# Altium PCB guitar_tuner.PcbDoc
Units mil, origin at the board's own origin, x right, y up, seen from the top; angles counter-clockwise.
Board outline 3140 x 3665 mil, 2 copper layers (Top Layer, Bottom Layer); 53 components, 59 nets, 206 pads, 16 vias.
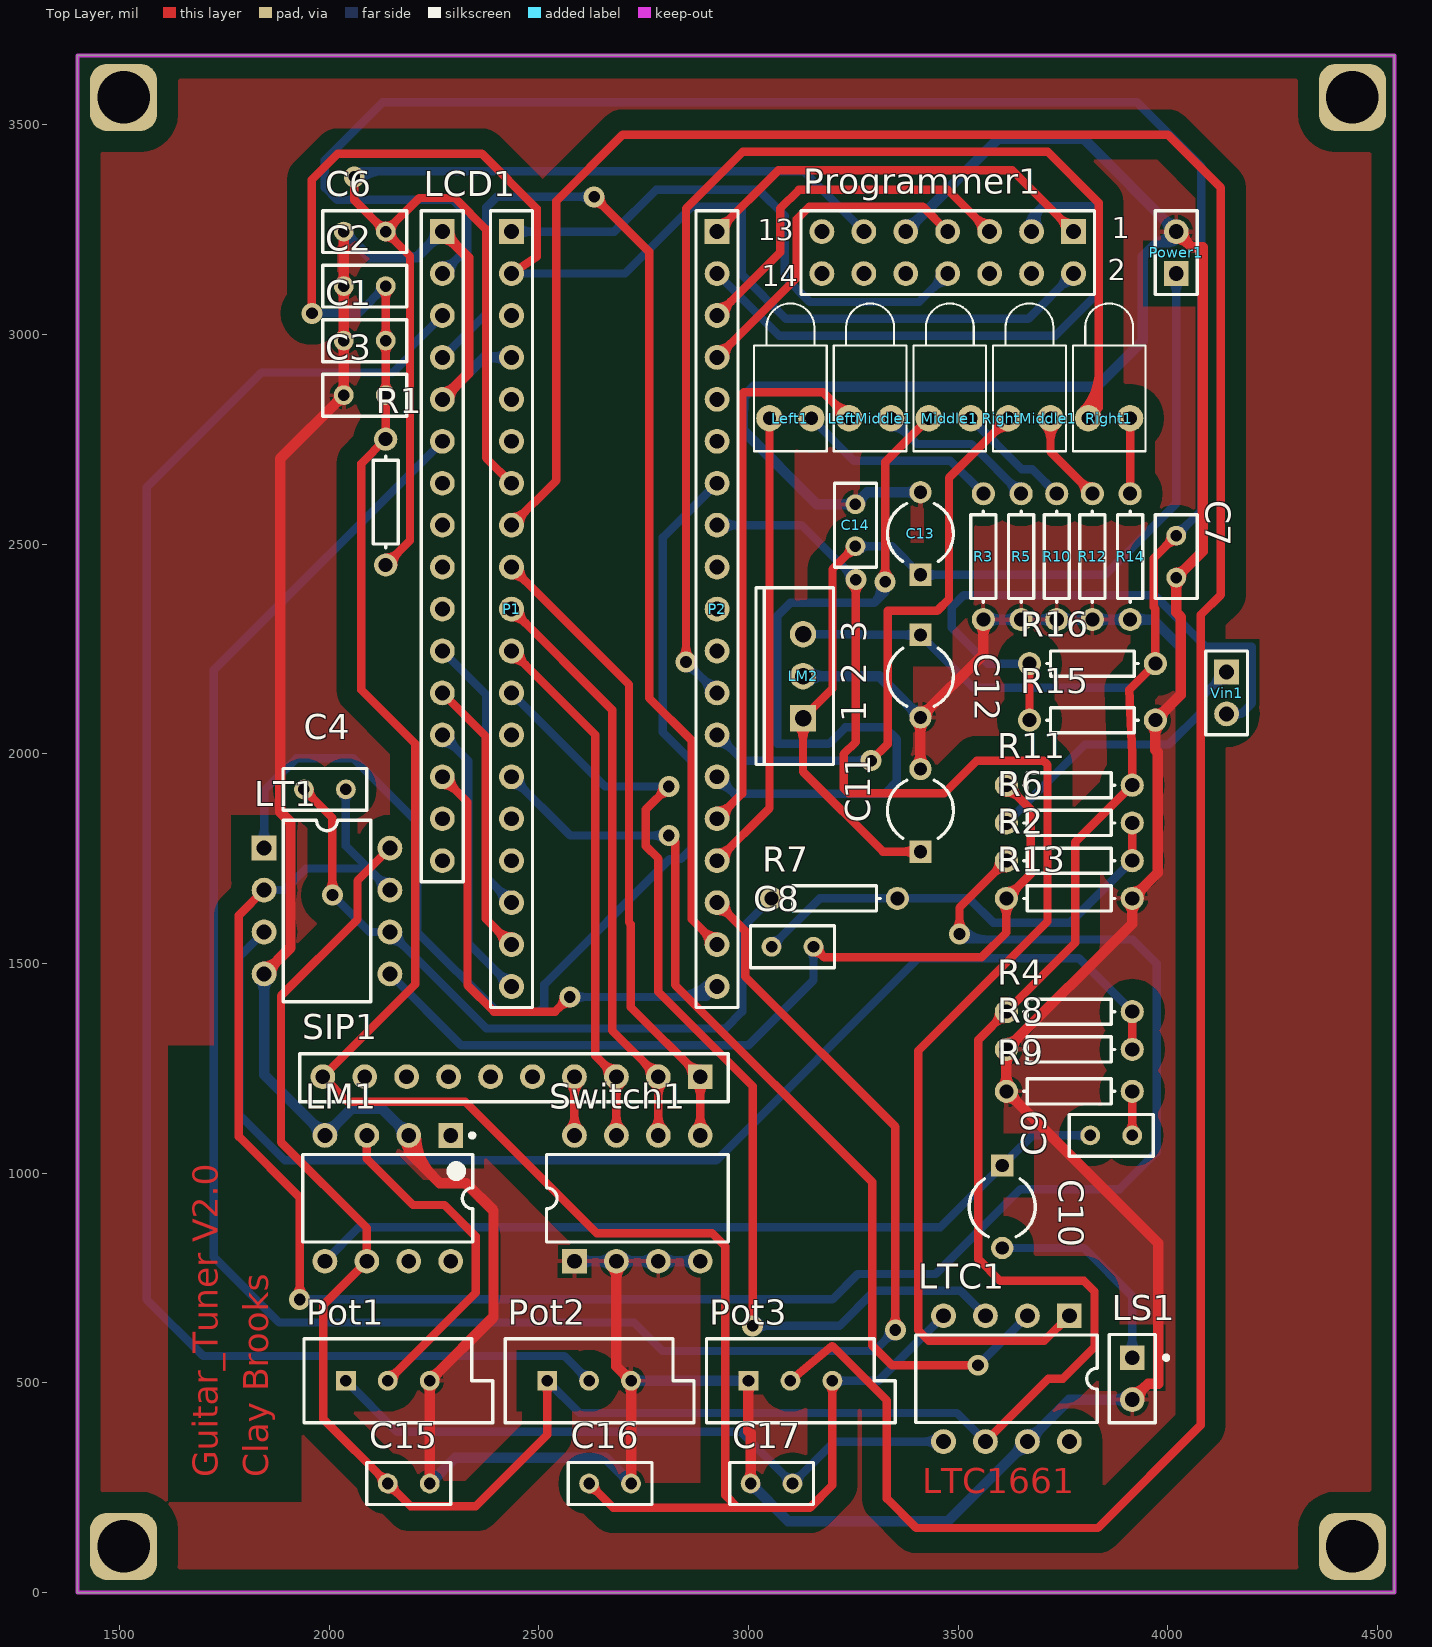
[diagram p0: Top Layer view]
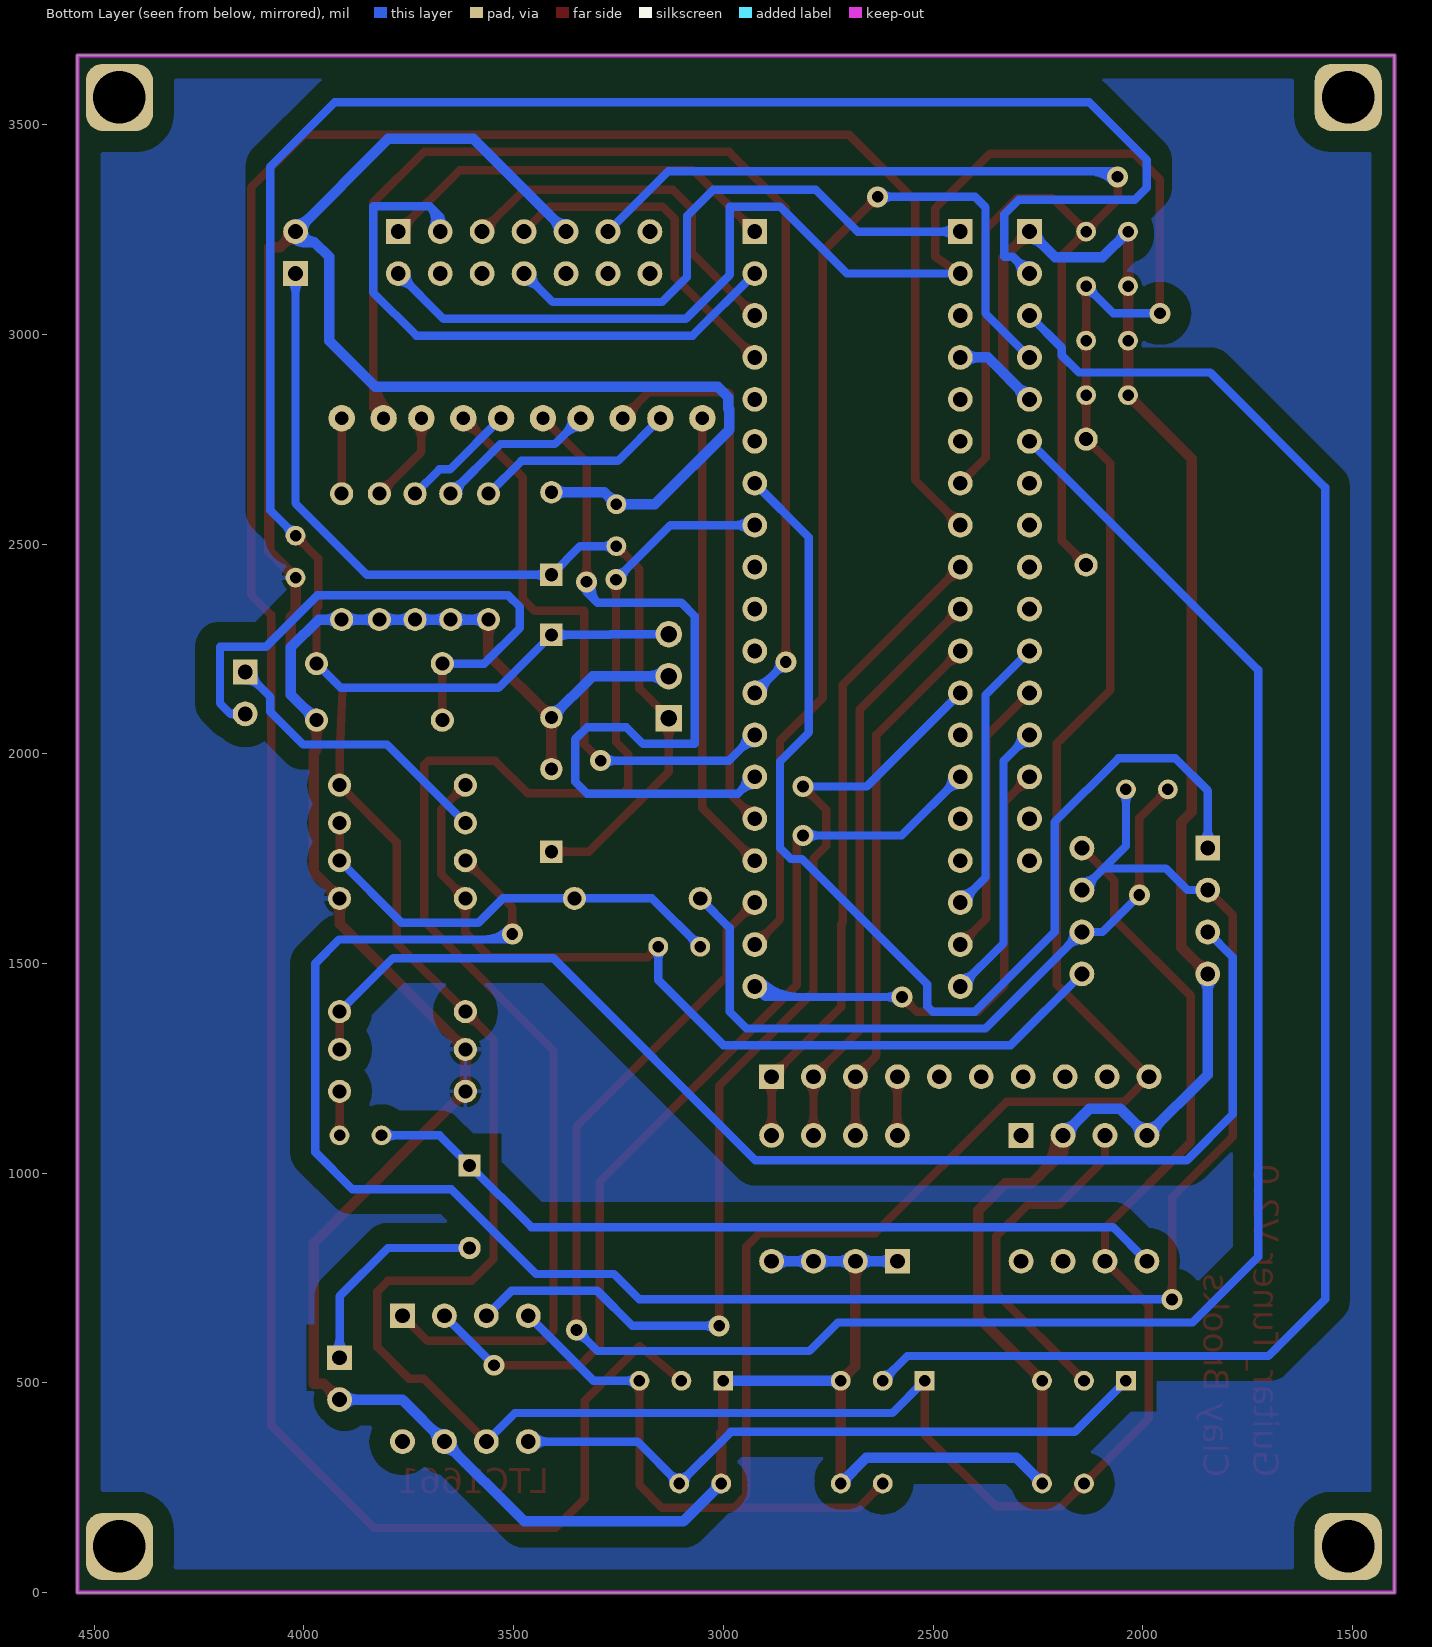
[diagram p1: Bottom Layer view, seen from below]

## Layer stack, top to bottom
Top Layer: signal copper 1.4
Dielectric: dielectric 12.6, FR-4, Dk 4.8
Bottom Layer: signal copper 1.4

## Board outline
1400,0 1400,3665 4540,3665 4540,0 1400,0

## Design rules (kind name [scope] priority, off if disabled: settings)
Clearance "PolyGon Pour Clearance" [InPolyGon] p1: gap=50
PolygonConnect [All] p1: connectstyle=Relief reliefconductorwidth=10 reliefentries=4 polygonreliefangle="90 Angle" airgapwidth=10
RoutingVias [All] p1: holewidth=28 width=50 viastyle="Through Hole" minholewidth=28 minwidth=50 maxholewidth=28 maxwidth=50
SilkscreenOverComponentPads [All] p1: minsilkscreentomaskgap=10
SolderMaskExpansion [All] p1: expansion=4
Width "Schematic Width Constraint" [InNet('GND')] p1: maxlimit=30 minlimit=20 preferedwidth=25
Width "GND net width" [InNet('GND')] p2: maxlimit=30 minlimit=20 preferedwidth=30
Width [All] p3: maxlimit=20 minlimit=20 preferedwidth=20
27 further rules are at their usual default settings.

## Components (designator, comment, footprint, x,y, rotation, side; value= is the part's Value field where it differs from the comment)
C1 "Cap" RAD-0.1 2085,2985 r0 top
C2 "Cap" RAD-0.1 2085,3115 r180 top
C3 "Cap" RAD-0.1 2085,2855 r180 top
C4 "Cap" RAD-0.1 1990,1915 r0 top
C6 "Cap" RAD-0.1 2085,3245 r180 top
C7 "Cap" RAD-0.1 4020,2470 r270 top
C8 "Cap" RAD-0.1 3105,1540 r180 top
C9 "Cap" RAD-0.1 3865,1090 r180 top
C10 "Cap Pol1" CAPR5-4X5 3605,920 r270 top
C11 "Cap Pol1" CAPR5-4X5 3410,1865 r90 top
C12 "Cap Pol1" CAPR5-4X5 3410,2185 r270 top
C13 "Cap Pol1" CAPR5-4X5 3410,2525 r90 top
C14 "Cap" RAD-0.1 3255,2545 r270 top
C15 "Cap" RAD-0.1 2190,260 r0 top
C16 "Cap" RAD-0.1 2670,260 r0 top
C17 "Cap" RAD-0.1 3055,260 r180 top
LCD1 "Header 16" HDR1X16 2270,3245 r270 top
Left1 "LED1" LED-1 3100,2800 r90 top
LeftMiddle1 "LED1" LED-1 3290,2800 r90 top
LM1 "LM386N-1" N08E 2140,940 r270 top
LM2 "LM330KC" KC03 3130,2185 r90 top
LS1 "Speaker" PIN2 3915,560 r270 top
LT1 "LF353P" P008 1995,1625 r270 top
LTC1 "LTC1661" LTC1661#1 3620,510 r180 top
Middle1 "LED1" LED-1 3480,2800 r90 top
P1 "Header 19" HDR1X19 2435,3245 r270 top locked
P2 "Header 19" HDR1X19 2925,3245 r270 top locked
Pot1 "RPot" VR5 2140,505 r0 top
Pot2 "RPot" VR5 2620,505 r0 top
Pot3 "RPot" VR5 3100,505 r0 top
Power1 "Power" HDR1X2 4020,3145 r90 top
Programmer1 "Header 7X2" HDR2X7 3775,3245 r180 top
R1 "Res1" AXIAL-0.3 2135,2600 r90 top
R2 "Res1" AXIAL-0.3 3765,1745 r180 top
R3 "Res1" AXIAL-0.3 3560,2470 r270 top
R4 "Res1" AXIAL-0.3 3765,1385 r0 top
R5 "Res1" AXIAL-0.3 3650,2470 r270 top
R6 "Res1" AXIAL-0.3 3765,1835 r0 top
R7 "Res1" AXIAL-0.3 3205,1655 r180 top
R8 "Res1" AXIAL-0.3 3765,1295 r0 top
R9 "Res1" AXIAL-0.3 3765,1195 r180 top
R10 "Res1" AXIAL-0.3 3735,2470 r270 top
R11 "Res1" AXIAL-0.3 3765,1925 r180 top
R12 "Res1" AXIAL-0.3 3820,2470 r270 top
R13 "Res1" AXIAL-0.3 3765,1655 r180 top
R14 "Res1" AXIAL-0.3 3910,2470 r270 top
R15 "Res1" AXIAL-0.3 3820,2080 r180 top
R16 "Res1" AXIAL-0.3 3820,2215 r180 top
Right1 "LED1" LED-1 3860,2800 r90 top
RightMiddle1 "LED1" LED-1 3670,2800 r90 top
SIP1 "Component_1" RPack 2720,1210 r180 top
Switch1 "Component_1" LTC1661#2 2735,955 r0 top
Vin1 "GuitarIn" HDR1X2 4140,2195 r270 top

## Footprints (in the part's own frame and the unit in brackets; to place one, negate y for a bottom-side part, rotate by r counter-clockwise, add the part's x,y. Pads: shape width x height; smd on the part's side, far side on the other; paste and mask are expansions set on the pad)
AXIAL-0.3 [mm] "Axial Device, Thru-Hole; 2 Leads; 0.3 in Pin Spacing"
  round 1.4 hole 0.85: 1(-3.81,0) 2(3.81,0)
  silkscreen extent -2.77,-0.76 2.77,0.76
CAPR5-4X5 [mm] "Capacitor; 2 Leads"
  rect 1.35x1.35 hole 0.8: 1(-2.5,0)
  round 1.35 hole 0.8: 2(2.5,0)
  silkscreen extent -1.69,-2 1.82,2
HDR1X2 [mm] "Connector; Header; 2 Position"
  rect 1.5x1.5 hole 0.9: 1(0,0)
  round 1.5 hole 0.9: 2(2.54,0)
  silkscreen extent -1.27,-1.27 3.81,1.27
HDR1X16 [mm] "Connector; Header; 16 Position"
  rect 1.5x1.5 hole 0.9: 1(0,0)
  round 1.5 hole 0.9: 2(2.54,0) 3(5.08,0) 4(7.62,0) 5(10.16,0) 6(12.7,0) 7(15.24,0) 8(17.78,0) 9(20.32,0) 10(22.86,0) 11(25.4,0) 12(27.94,0) 13(30.48,0) 14(33.02,0) 15(35.56,0) 16(38.1,0)
  silkscreen extent -1.27,-1.27 39.37,1.27
HDR1X19 [mm] "Connector; Header; 19 Position"
  rect 1.5x1.5 hole 0.9: 1(0,0)
  round 1.5 hole 0.9: 2(2.54,0) 3(5.08,0) 4(7.62,0) 5(10.16,0) 6(12.7,0) 7(15.24,0) 8(17.78,0) 9(20.32,0) 10(22.86,0) 11(25.4,0) 12(27.94,0) 13(30.48,0) 14(33.02,0) 15(35.56,0) 16(38.1,0) 17(40.64,0) 18(43.18,0) 19(45.72,0)
  silkscreen extent -1.27,-1.27 46.99,1.27
HDR2X7 [mm] "Connector; Header; 7x2 Position"
  rect 1.5x1.5 hole 0.9: 1(0,0)
  round 1.5 hole 0.9: 2(0,2.54) 3(2.54,0) 4(2.54,2.54) 5(5.08,0) 6(5.08,2.54) 7(7.62,0) 8(7.62,2.54) 9(10.16,0) 10(10.16,2.54) 11(12.7,0) 12(12.7,2.54) 13(15.24,0) 14(15.24,2.54)
  silkscreen extent -1.27,-1.27 16.51,3.81
KC03 [mm] "TO, Thru-Hole, Vertical, Heatsink Mounted; 3 In-Line Leads; Pitch 2.54 mm"
  rect 1.6x1.6 hole 1: 1(-2.54,0)
  round 1.6 hole 1: 2(0,0) 3(2.54,0)
  silkscreen extent -5.35,-1.85 5.35,2.85
LED-1 [mm] "LED; 2 Leads"
  round 1.6 hole 0.8: 1(0,1.27) 2(0,-1.27)
  silkscreen extent -2,-2.2 6.95,2.2
LTC1661#1 [mm]
  rect 1.5x1.5 hole 0.9: 1(-3.683,-3.81)
  round 1.5 hole 0.9: 2(-1.143,-3.81) 3(1.397,-3.81) 4(3.937,-3.81) 5(3.937,3.81) 6(1.397,3.81) 7(-1.143,3.81) 8(-3.683,3.81)
  silkscreen extent -5.37,-2.65 5.63,2.65
LTC1661#2 [mm]
  rect 1.5x1.5 hole 0.9: 1(-3.81,-4.191)
  round 1.5 hole 0.9: 2(-1.27,-4.191) 3(1.27,-4.191) 4(3.81,-4.191) 5(3.81,3.429) 6(1.27,3.429) 7(-1.27,3.429) 8(-3.81,3.429)
  silkscreen extent -5.5,-3.03 5.5,2.27
N08E [mm] "DIP, 8-Leads, Row Spacing 7.62mm, Pitch 2.54mm, Body 9.91x6.35mm"
  rect 1.5x1.5 hole 0.9: 1(-3.81,3.81)
  round 1.5 hole 0.9: 2(-3.81,1.27) 3(-3.81,-1.27) 4(-3.81,-3.81) 5(3.81,-3.81) 6(3.81,-1.27) 7(3.81,1.27) 8(3.81,3.81)
  silkscreen extent -3.93,-5.15 2.65,5.24, body extent -3.6,-5.15 3.6,5.15, height 5.34
P008 [mm] "DIP; 8 Leads; Row Spacing 7.62 mm; Pitch 2.54 mm"
  rect 1.5x1.5 hole 0.9: 1(-3.81,-3.81)
  round 1.5 hole 0.9: 2(-1.27,-3.81) 3(1.27,-3.81) 4(3.81,-3.81) 5(3.81,3.81) 6(1.27,3.81) 7(-1.27,3.81) 8(-3.81,3.81)
  silkscreen extent -5.5,-2.65 5.5,2.65
PIN2 [mm] "Photosensitive Diode; 2 Leads"
  rect 1.5x1.5 hole 0.9: 1(0,0)
  round 1.5 hole 0.9: 2(2.54,0)
  silkscreen extent -1.4,-1.4 3.94,2.18
RAD-0.1 [mm] "Radial Cap, Thru-Hole; 2 Leads; 0.1 in Pin Spacing"
  round 1.2 hole 0.7: 1(-1.27,0) 2(1.27,0)
  silkscreen extent -2.54,-1.27 2.54,1.27
RPack [mm]
  rect 1.5x1.5 hole 0.9: 1(-4.191,-0.508)
  round 1.5 hole 0.9: 2(-1.651,-0.508) 3(0.889,-0.508) 4(3.429,-0.508) 5(5.969,-0.508) 6(8.509,-0.508) 7(11.049,-0.508) 8(13.589,-0.508) 9(16.129,-0.508) 10(18.669,-0.508)
  silkscreen extent -5.88,-1.91 20.07,1.02
VR5 [mm] "Thru-Hole; 3 Leads"
  rect 1.2x1.2 hole 0.7: 1(-2.54,0)
  round 1.2 hole 0.7: 2(0,0) 3(2.54,0)
  silkscreen extent -5.08,-2.54 6.35,2.54

## Part data
C1 C2 C3 C4 C6 C7 C8 C9 C14 C15 C16 C17: "Capacitor"
C10 C11 C12 C13: "Polarized Capacitor (Radial)"
LCD1: "Header, 16-Pin"
Left1 LeftMiddle1 Middle1 Right1 RightMiddle1: "Typical RED GaAs LED"
LM1: "Low Voltage Audio Power Amplifier, 8-pin MDIP"
LM2: "3-Terminal Positive Regulator"
LS1: "Loudspeaker"
LT1: "Dual Operational Amplifier"
P1 P2: "Header, 19-Pin"
Pot1 Pot2 Pot3: "Potentiometer"
Power1 Vin1: library part "Header 2", "Header, 2-Pin"
Programmer1: "Header, 7-Pin, Dual row"
R1 R2 R3 R4 R5 R6 R7 R8 R9 R10 R11 R12 R13 R14 R15 R16: "Resistor"

## Free pads (board coordinates)
  rrect50% 160x160 hole 125: 5(1510,3565) 6(4440,3565) 7(4440,110) 8(1510,110)

## Via types
v1: diameter 50, hole 28, Top Layer to Bottom Layer, 16 vias

## Nets (pads, with @x,y where several pads share a name; then routed paths per layer and width w, separated by ;. In a path a pad name is that pad's centre, name@x,y a point inside that pad or via, vN(x,y) a via of type N, cw(c..) or ccw(c..) an arc to the next point about the centre after c; other vN are vias at no path point)
2.5V: R15.2 R16.2 Vin1.2 | length 1432.1
  Top Layer w20: R15.2 R16.2
  Bottom Layer w20: R16.2 3570,2215 3485,2300 3485,2350 3513,2378 3968,2378 4091,2255 4200,2255 4200,2120 4175,2095 ; Vin1.2 4175,2095 ; Vin1.2@4156.62,2084.74 cw(c4175,2073.4) 4175,2095 ; Vin1.2@4156.62,2105.26 ccw(c4175,2116.6) 4175,2095
5V: C7.1 C12.1 C15.1 LCD1.2 LM1.6 LM2.3 LT1.8 LTC1.6 Pot2.1 R4.1 R11.1 R16.1 | length 11346.9
  Top Layer w20: C15.1@2126.38,260 ccw(c2093.49,260) 2116.75,283.25 ccw(c2140,306.51) C15.1@2140,273.62 ; C15.1@2140,246.38 cw(c2140,213.49) 2163.25,236.75 cw(c2186.51,260) C15.1@2153.62,260 ; LT1.8 2067.63,1697.63 2067.63,1605.16 1885.47,1423 1885.47,1073.75 2090,869.22 LM1.6 1986,686 1986,414 C15.1 2194,206 2350,206 2520,376 Pot2.1 ; Pot2.1@2510.37,495.37 cw(c2487.11,472.11) 2520,472.11 cw(c2552.89,472.11) Pot2.1@2529.63,495.37 ; LTC1.6 3715,510 3750,510 3825,585 3825,718 3800,743 3600,743 3548,795 3548,1318 R4.1 3778.96,1548.96 3778.96,1788.96 R11.1 3915,1999 3908,2153 R16.1 3970,2346 3966,2350 3966,2466 C7.1 ; R4.1@3597.44,1385 cw(c3555.05,1385) 3585.02,1355.02 cw(c3615,1325.05) R4.1@3615,1367.44 ; C7.1@4006.38,2520 cw(c3973.49,2520) 3996.75,2496.75 cw(c4020,2473.49) C7.1@4020,2506.38
  Bottom Layer w20: LCD1.2 2310,3185 2330,3185 2330,3286.63 2296.02,3320.61 2019.39,3320.61 1990,3350 1990,3415.61 2127.39,3553 3927,3553 4080,3400 4080,2580 C7.1 ; LCD1.2@2270,3164.53 ccw(c2270,3211.67) 2303.34,3178.34 ccw(c2336.67,3145) LCD1.2@2289.53,3145 ; Pot2.1 2597,428 3497,428 LTC1.6 ; LM2.3 3269,2285 3270.57,2283.43 C12.1 3536.43,2157 3912,2157 R16.1 ; C12.1@3398.28,2271.71 ccw(c3369.98,2243.41) 3369.98,2283.43 ccw(c3369.98,2323.44) C12.1@3398.28,2295.15 ; C7.1@4020,2533.62 ccw(c4020,2566.51) 4043.25,2543.25 ccw(c4066.51,2520) C7.1@4033.62,2520
AVCC: P1.16
AVSS: P1.15
GND: C1.1 C2.2 C3.2 C6.2 C7.2 C11.2 C12.2 C13.2 C14.1 C15.2 C16.2 C17.2 LCD1.1 LCD1.5 LM1.2 LM1.4 LM2.2 LS1.2 LT1.4 LTC1.7 P1.4 Pot1.3 Pot2.3 Pot3.1 Power1.2 Programmer1.9 R3.2 R5.2 R8.1 R9.2 R10.2 R12.2 R13.1 R14.2 R15.1 Switch1.1 Switch1.2 Switch1.3 Switch1.4 | length 19096.9
  Top Layer w25: LT1.4 1908,1538 1908,1837 1883,1862 1883,2703 C3.2 C1.1 C2.2 C6.2 ; LT1.4@1845,1492.03 ccw(c1845,1533.14) 1874.07,1504.07 ccw(c1903.14,1475) LT1.4@1862.03,1475 ; C3.2@2023.88,2855 cw(c1997.03,2855) 2016.01,2836.01 cw(c2035,2817.03) C3.2@2035,2843.88 ; C3.2@2027.14,2862.86 ccw(c2008.15,2881.85) 2035,2881.85 ccw(c2061.85,2881.85) C3.2@2042.86,2862.86 ; C1.1@2027.14,2977.14 cw(c2008.15,2958.15) 2035,2958.15 cw(c2061.85,2958.15) C1.1@2042.86,2977.14 ; C1.1@2027.14,2992.86 ccw(c2008.15,3011.85) 2035,3011.85 ccw(c2061.85,3011.85) C1.1@2042.86,2992.86 ; C2.2@2027.14,3107.14 cw(c2008.15,3088.15) 2035,3088.15 cw(c2061.85,3088.15) C2.2@2042.86,3107.14 ; C2.2@2027.14,3122.86 ccw(c2008.15,3141.85) 2035,3141.85 ccw(c2061.85,3141.85) C2.2@2042.86,3122.86 ; LM1.2@2178.2,1077.73 cw(c2151.54,1050) 2190,1050 ; LM1.2@2182.03,1090 ccw(c2259.35,1090) 2204.67,1035.33 ; LM1.2 2190,1050 ; LM1.2@2201.8,1077.73 ccw(c2228.46,1050) 2190,1050 ; LM1.2@2207.03,1090 ccw(c2344.7,1090) 2247.35,992.65 ; Pot1.3@2232.14,497.14 cw(c2213.15,478.15) 2240,478.15 cw(c2266.85,478.15) Pot1.3@2247.86,497.14 ; C15.2 Pot1.3 2392.03,657.03 2392.03,910.92 2327.24,975.7 2264.3,975.7 2190,1050 ; Pot1.3@2240,516.12 ccw(c2240,542.97) 2258.99,523.99 ccw(c2277.97,505) Pot1.3@2251.12,505 ; LCD1.5 2332.03,2907.03 2332.03,3182.97 LCD1.1 ; LCD1.5@2270,2862.03 ccw(c2270,2903.14) 2299.07,2874.07 ccw(c2328.14,2845) LCD1.5@2287.03,2845 ; LCD1.1@2270,3227.97 cw(c2270,3186.86) 2299.07,3215.93 cw(c2328.14,3245) LCD1.1@2287.03,3245 ; Switch1.2@2672.96,777.96 cw(c2643.89,748.89) 2685,748.89 cw(c2726.11,748.89) Switch1.2@2697.04,777.96 ; Switch1.2 2685,540 Pot2.3 C16.2 ; Pot2.3@2708.88,505 ccw(c2682.03,505) 2701.01,523.99 ccw(c2720,542.97) Pot2.3@2720,516.12 ; Pot2.3@2712.14,497.14 cw(c2693.15,478.15) 2720,478.15 cw(c2746.85,478.15) Pot2.3@2727.86,497.14 ; Pot3.1@2992.14,497.14 cw(c2973.15,478.15) 3000,478.15 cw(c3026.85,478.15) Pot3.1@3007.86,497.14 ; C17.2@2997.14,267.86 ccw(c2978.15,286.85) 3005,286.85 ccw(c3031.85,286.85) C17.2@3012.86,267.86 ; Pot3.1 3000,385 3005,380 C17.2 ; C11.2@3400.05,1973.38 ccw(c3376.02,1997.41) 3410,1997.41 ccw(c3443.98,1997.41) C11.2@3419.95,1973.38 ; C12.2@3400.05,2076.62 cw(c3376.02,2052.59) 3410,2052.59 cw(c3443.98,2052.59) C12.2@3419.95,2076.62 ; C11.2 C12.2 3560,2236.57 R3.2 ; C12.2@3410,2100.65 ccw(c3410,2134.63) 3434.03,2110.6 ccw(c3458.05,2086.57) C12.2@3424.07,2086.57 ; R3.2@3549.35,2309.35 cw(c3523.64,2283.64) 3560,2283.64 cw(c3596.36,2283.64) R3.2@3570.65,2309.35 ; R9.2@3604.35,1205.65 ccw(c3578.64,1231.36) 3615,1231.36 ccw(c3651.36,1231.36) R9.2@3625.65,1205.65 ; R8.1@3604.35,1284.35 cw(c3578.64,1258.64) 3615,1258.64 cw(c3651.36,1258.64) R8.1@3625.65,1284.35 ; R9.2@3615,1179.94 cw(c3615,1143.59) 3640.71,1169.29 cw(c3666.41,1195) R9.2@3630.06,1195 ; R8.1@3615,1310.06 ccw(c3615,1346.41) 3640.71,1320.71 ccw(c3666.41,1295) R8.1@3630.06,1295 ; R13.1@3904.35,1644.35 cw(c3878.64,1618.64) 3915,1618.64 cw(c3951.36,1618.64) R13.1@3925.65,1644.35 ; LS1.2 3952.97,497.97 3977.03,497.97 3977.03,832.97 R9.2 R8.1 3915,1595 R13.1 3976,1716 3976,2003 3970,2009 R15.1 4031,2141 4031,2326 4020,2337 C7.2 4083,2483 4083,3208 4057,3208 Power1.2 ; LS1.2@3915,477.03 ccw(c3915,518.14) 3944.07,489.07 ccw(c3973.14,460) LS1.2@3932.03,460 ; R13.1@3915,1670.06 ccw(c3915,1706.41) 3940.71,1680.71 ccw(c3966.41,1655) R13.1@3930.06,1655 ; R15.1@3959.35,2069.35 cw(c3933.64,2043.64) 3970,2043.64 cw(c4006.36,2043.64) R15.1@3980.65,2069.35 ; R15.1@3970,2095.06 ccw(c3970,2131.41) 3995.71,2105.71 ccw(c4021.41,2080) R15.1@3985.06,2080 ; C7.2@4012.14,2412.14 cw(c3993.15,2393.15) 4020,2393.15 cw(c4046.85,2393.15) C7.2@4027.86,2412.14 ; C7.2@4020,2431.12 ccw(c4020,2457.97) 4038.99,2438.99 ccw(c4057.97,2420) C7.2@4031.12,2420 ; Power1.2@4020,3227.97 cw(c4020,3186.86) 4049.07,3215.93 cw(c4078.14,3245) Power1.2@4037.03,3245
  Bottom Layer w25: LT1.4@1832.96,1462.96 cw(c1803.89,1433.89) 1845,1433.89 cw(c1886.11,1433.89) LT1.4@1857.04,1462.96 ; LT1.4 1845,1235 LM1.4 2053,1153 2127,1153 LM1.2 ; LM1.4@1972.97,1090 ccw(c1931.86,1090) 1960.93,1119.07 ccw(c1990,1148.14) 1990,1107.03 ccw(c1990,1148.14) 2019.07,1119.07 ccw(c2048.14,1090) LM1.4@2007.03,1090 ; C6.2@2035,3233.88 cw(c2035,3207.03) 2053.99,3226.01 cw(c2072.97,3245) C6.2@2046.12,3245 ; C6.2 2096,3184 2209,3184 LCD1.1 ; LM1.2@2172.97,1090 ccw(c2131.86,1090) 2160.93,1119.07 ccw(c2190,1148.14) LM1.2@2190,1107.03 ; C15.2 2301,321 2659,321 C16.2 ; C15.2@2240,271.12 ccw(c2240,297.97) 2258.99,278.99 ccw(c2277.97,260) C15.2@2251.12,260 ; LCD1.1@2252.97,3245 cw(c2211.86,3245) 2240.93,3215.93 cw(c2270,3186.86) LCD1.1@2270,3227.97 ; LCD1.5 2370,2945 P1.4 ; LCD1.5@2270,2862.03 ccw(c2270,2903.14) 2299.07,2874.07 ccw(c2328.14,2845) LCD1.5@2287.03,2845 ; P1.4@2422.96,2932.96 ccw(c2393.89,2903.89) 2393.89,2945 ccw(c2393.89,2986.11) P1.4@2422.96,2957.04 ; Switch1.1 Switch1.2 Switch1.3 Switch1.4 ; Switch1.1@2597.04,777.96 cw(c2626.11,748.89) 2626.11,790 cw(c2626.11,831.11) Switch1.1@2597.04,802.04 ; Switch1.2@2672.96,777.96 ccw(c2643.89,748.89) 2643.89,790 ccw(c2643.89,831.11) Switch1.2@2672.96,802.04 ; Switch1.2@2697.04,777.96 cw(c2726.11,748.89) 2726.11,790 cw(c2726.11,831.11) Switch1.2@2697.04,802.04 ; C16.2@2708.88,260 ccw(c2682.03,260) 2701.01,278.99 ccw(c2720,297.97) C16.2@2720,271.12 ; Pot2.3 Pot3.1 ; Pot2.3@2727.86,497.14 cw(c2746.85,478.15) 2746.85,505 cw(c2746.85,531.85) Pot2.3@2727.86,512.86 ; Switch1.3@2772.96,777.96 ccw(c2743.89,748.89) 2743.89,790 ccw(c2743.89,831.11) Switch1.3@2772.96,802.04 ; Switch1.3@2797.04,777.96 cw(c2826.11,748.89) 2826.11,790 cw(c2826.11,831.11) Switch1.3@2797.04,802.04 ; Switch1.4@2872.96,777.96 ccw(c2843.89,748.89) 2843.89,790 ccw(c2843.89,831.11) Switch1.4@2872.96,802.04 ; Pot3.1@2992.14,497.14 ccw(c2973.15,478.15) 2973.15,505 ccw(c2973.15,531.85) Pot3.1@2992.14,512.86 ; C17.2@3005,248.88 cw(c3005,222.03) 3023.99,241.01 cw(c3042.97,260) C17.2@3016.12,260 ; C17.2 3095,170 3475,170 LTC1.7 3765,460 LS1.2 ; LM2.2 3311.57,2185 C12.2 ; LM2.2@3143.43,2171.57 cw(c3175.86,2139.14) 3175.86,2185 cw(c3175.86,2230.86) LM2.2@3143.43,2198.43 ; C14.1@3247.14,2587.14 ccw(c3228.15,2568.15) 3228.15,2595 ccw(c3228.15,2621.85) C14.1@3247.14,2602.86 ; C14.1@3255,2606.12 ccw(c3255,2632.97) 3273.99,2613.99 ccw(c3292.97,2595) C14.1@3266.12,2595 ; Programmer1.9 3596,3466 3799,3466 Power1.2 3995,3220 3975,3220 ; Programmer1.9@3375,3262.03 ccw(c3375,3303.14) 3404.07,3274.07 ccw(c3433.14,3245) Programmer1.9@3392.03,3245 ; C12.2@3395.93,2086.57 ccw(c3361.95,2086.57) 3385.97,2110.6 ccw(c3410,2134.63) C12.2@3410,2100.65 ; C13.2@3400.05,2613.47 ccw(c3376.02,2589.45) 3376.02,2623.43 ccw(c3376.02,2657.41) C13.2@3400.05,2633.38 ; C13.2 3283.43,2623.43 C14.1 3163,2595 2986,2772 2986,2821 2988,2823 2988,2850 3013,2875 3830,2875 3940,2985 3940,3185 3975,3220 ; R3.2 R5.2 R10.2 R12.2 R14.2 3965,2320 4031,2254 4031,2141 R15.1 ; R3.2@3570.65,2309.35 cw(c3596.36,2283.64) 3596.36,2320 cw(c3596.36,2356.36) R3.2@3570.65,2330.65 ; R5.2@3639.35,2309.35 ccw(c3613.64,2283.64) 3613.64,2320 ccw(c3613.64,2356.36) R5.2@3639.35,2330.65 ; LTC1.7@3647.97,360 cw(c3606.86,360) 3635.93,330.93 cw(c3665,301.86) LTC1.7@3665,342.97 ; R5.2@3660.65,2309.35 cw(c3686.36,2283.64) 3686.36,2320 cw(c3686.36,2356.36) R5.2@3660.65,2330.65 ; LTC1.7@3665,377.03 ccw(c3665,418.14) 3694.07,389.07 ccw(c3723.14,360) LTC1.7@3682.03,360 ; R10.2@3724.35,2309.35 ccw(c3698.64,2283.64) 3698.64,2320 ccw(c3698.64,2356.36) R10.2@3724.35,2330.65 ; R10.2@3745.65,2309.35 cw(c3771.36,2283.64) 3771.36,2320 cw(c3771.36,2356.36) R10.2@3745.65,2330.65 ; R12.2@3809.35,2309.35 ccw(c3783.64,2283.64) 3783.64,2320 ccw(c3783.64,2356.36) R12.2@3809.35,2330.65 ; R12.2@3830.65,2309.35 cw(c3856.36,2283.64) 3856.36,2320 cw(c3856.36,2356.36) R12.2@3830.65,2330.65 ; R14.2@3899.35,2309.35 ccw(c3873.64,2283.64) 3873.64,2320 ccw(c3873.64,2356.36) R14.2@3899.35,2330.65 ; LS1.2@3902.96,447.96 ccw(c3873.89,418.89) 3873.89,460 ccw(c3873.89,501.11) LS1.2@3902.96,472.04 ; R14.2@3920.65,2309.35 cw(c3946.36,2283.64) 3946.36,2320 cw(c3946.36,2356.36) R14.2@3920.65,2330.65 ; R15.1@3970,2095.06 ccw(c3970,2131.41) 3995.71,2105.71 ccw(c4021.41,2080) R15.1@3985.06,2080 ; 4001.77,3220 ccw(c4001.77,3246.25) Power1.2@4027.95,3244.46 ; Power1.2@4002.97,3245 ccw(c3961.86,3245) 3990.93,3274.07 ccw(c4020,3303.14) Power1.2@4020,3262.03 ; Power1.2@4003.01,3246.16 cw(c3975,3248.08) 3975,3220
MSPOWER: C1.2 C2.1 C3.1 C16.1 LTC1.4 P1.2 Pot3.3 Programmer1.2 R1.2 SIP1.10 | length 8541.7
  Top Layer w20: v1(1959,3050) 1959,3369 2021,3431 2364,3431 2495,3300 2495,3185 P1.2 ; C3.1@2125.37,2845.37 cw(c2102.11,2822.11) 2135,2822.11 cw(c2167.89,2822.11) C3.1@2144.63,2845.37 ; C3.1@2125.37,2864.63 ccw(c2102.11,2887.89) 2135,2887.89 ccw(c2167.89,2887.89) C3.1@2144.63,2864.63 ; C1.2@2125.37,2975.37 cw(c2102.11,2952.11) 2135,2952.11 cw(c2167.89,2952.11) C1.2@2144.63,2975.37 ; C1.2@2125.37,2994.63 ccw(c2102.11,3017.89) 2135,3017.89 ccw(c2167.89,3017.89) C1.2@2144.63,2994.63 ; C2.1@2125.37,3105.37 cw(c2102.11,3082.11) 2135,3082.11 cw(c2167.89,3082.11) C2.1@2144.63,3105.37 ; C2.1 C1.2 C3.1 R1.2 2077,2692 2077,2152 2205,2024 2205,1450 SIP1.10 2045,1170 2325,1170 2638,857 2913,857 2945,825 2945,232 2975,202 ; C16.1@2620,246.38 cw(c2620,213.49) 2643.25,236.75 cw(c2666.51,260) C16.1@2633.62,260 ; C16.1 2678,202 2975,202 ; Pot3.3@3190.37,495.37 cw(c3167.11,472.11) 3200,472.11 cw(c3232.89,472.11) Pot3.3@3209.63,495.37 ; Pot3.3 3200,256 3146,202 2975,202
  Bottom Layer w20: v1(1959,3050) 2070,3050 C2.1 ; C2.1@2121.38,3115 cw(c2088.49,3115) 2111.75,3091.75 cw(c2135,3068.49) C2.1@2135,3101.38 ; P1.2 2705.47,3145 2865,3304.53 2984.53,3304.53 2984.53,3142.04 3089.57,3037 3667,3037 Programmer1.2 ; Pot3.3 3310,505 LTC1.4 ; Pot3.3@3209.63,495.37 cw(c3232.89,472.11) 3232.89,505 cw(c3232.89,537.89) Pot3.3@3209.63,514.63 ; Programmer1.2@3755.47,3145 cw(c3708.33,3145) 3741.66,3111.66 cw(c3775,3078.33) Programmer1.2@3775,3125.47
NetC4_1: C4.1 LT1.6 R7.2 | length 1887
  Top Layer w20: C4.1@1940,1901.38 cw(c1940,1868.49) 1963.25,1891.75 cw(c1986.51,1915) C4.1@1953.62,1915 ; C4.1 2008,1847 v1(2008,1663) ; v1@1997.39,1673.61 ccw(c1971.79,1699.21) 2008,1699.21 ccw(c2044.21,1699.21) v1@2018.61,1673.61
  Bottom Layer w20: v1(2008,1663) 2096,1575 LT1.6 2375,1345 2945,1345 2985,1385 2985,1585 R7.2 ; LT1.6@2145,1555.47 cw(c2145,1508.33) 2178.34,1541.66 cw(c2211.67,1575) LT1.6@2164.53,1575
NetC4_2: C4.2 LT1.2 LT1.7 R2.2 | length 5342.4
  Top Layer w20: LT1.2 1785,1615 1785,1087 1930,942 v1(1930,699) ; v1@1919.39,709.61 ccw(c1893.79,735.21) 1930,735.21 ccw(c1966.21,735.21) v1@1940.61,709.61 ; v1@3492.39,1580.61 ccw(c3466.79,1606.21) 3503,1606.21 ccw(c3539.21,1606.21) v1@3513.61,1580.61 ; v1(3503,1570) 3503,1633 R2.2 ; R2.2@3597.44,1745 cw(c3555.05,1745) 3585.02,1715.02 cw(c3615,1685.05) R2.2@3615,1727.44
  Bottom Layer w20: LT1.2 1893.59,1675 1945,1726.41 2093.59,1726.41 ; v1(1930,699) 3200.03,699 3260.56,759.53 3446.53,759.53 3649,962 3885,962 3973,1050 3973,1500 3916,1557 3516,1557 v1(3503,1570) ; C4.2@2030.37,1905.37 cw(c2007.11,1882.11) 2040,1882.11 cw(c2072.89,1882.11) C4.2@2049.63,1905.37 ; C4.2 2040,1780 2093.59,1726.41 ; LT1.7@2125.47,1675 ccw(c2078.33,1675) 2111.66,1708.34 ccw(c2145,1741.67) LT1.7@2145,1694.53 ; LT1.7 2093.59,1726.41 ; v1@3513.61,1580.61 ccw(c3570.6,1637.6) 3570.6,1557
NetC8_1: C8.1 LT1.5 R11.2 R13.2 | length 2421.9
  Top Layer w20: C8.1@3155,1526.38 cw(c3155,1493.49) 3178.25,1516.75 cw(c3201.51,1540) C8.1@3168.62,1540 ; C8.1 3180.31,1514.69 3555.96,1514.69 3615,1573.74 R13.2 3673,1713 3673,1867 R11.2 ; R13.2@3602.58,1642.58 cw(c3572.61,1612.61) 3615,1612.61 cw(c3657.39,1612.61) R13.2@3627.42,1642.58 ; R13.2@3615,1672.56 ccw(c3615,1714.95) 3644.98,1684.98 ccw(c3674.95,1655) R13.2@3632.56,1655 ; R11.2@3615,1907.44 cw(c3615,1865.05) 3644.98,1895.02 cw(c3674.95,1925) R11.2@3632.56,1925
  Bottom Layer w20: LT1.5 2315,1305 3000,1305 3155,1460 C8.1 ; C8.1@3145.37,1530.37 cw(c3122.11,1507.11) 3155,1507.11 cw(c3187.89,1507.11) C8.1@3164.63,1530.37
NetC8_2: C8.2 R2.1 R6.2 R7.1 | length 1134.6
  Top Layer w20: R2.1 R6.2
  Bottom Layer w20: C8.2 3170,1655 R7.1 3525.96,1655 3583.96,1597 3767,1597 R2.1 ; C8.2@3055,1553.62 ccw(c3055,1586.51) 3078.25,1563.25 ccw(c3101.51,1540) C8.2@3068.62,1540
NetC9_1: C9.1 R9.1 | length 156.7
  Top Layer w20: C9.1@3905.37,1099.63 ccw(c3882.11,1122.89) 3915,1122.89 ccw(c3947.89,1122.89) C9.1@3924.63,1099.63 ; C9.1 R9.1
NetC9_2: C9.2 C10.1 LM1.5 | length 2000.9
  Bottom Layer w20: LM1.5 2071.16,871.16 3457.74,871.16 C10.1 3676.57,1090 C9.2 ; C9.2@3805.37,1080.37 ccw(c3782.11,1057.11) 3782.11,1090 ccw(c3782.11,1122.89) C9.2@3805.37,1099.63
NetC10_2: C10.2 LS1.1 | length 578.3
  Bottom Layer w20: C10.2 3800,821.57 3915,706.57 LS1.1 ; LS1.1@3901.19,573.81 ccw(c3867.86,607.14) 3915,607.14 ccw(c3962.14,607.14) LS1.1@3928.81,573.81
NetLeft1_2: Left1.2 R3.1 | length 484.6
  Bottom Layer w20: Left1.2 3251.5,2698.5 3481.5,2698.5 R3.1
NetLeftMiddle1_2: LeftMiddle1.2 R5.1 | length 532.7
  Bottom Layer w20: LeftMiddle1.2@3340,2778.5 cw(c3340,2726.61) 3376.7,2763.3 cw(c3413.39,2800) LeftMiddle1.2@3361.5,2800 ; LeftMiddle1.2 3401.5,2738.5 3531.5,2738.5 R5.1 ; R5.1@3632.44,2620 ccw(c3590.05,2620) 3620.02,2649.98 ccw(c3650,2679.95) R5.1@3650,2637.56
NetLT1_3: LT1.3 R4.2 R8.2 | length 2977.1
  Top Layer w20: R8.2 R4.2
  Bottom Layer w20: LT1.3 1785.47,1515.47 1785.47,1140 1895,1030.47 2923.47,1030.47 3405.56,1512.56 3787.44,1512.56 R4.2
NetMiddle1_2: Middle1.2 R10.1 | length 279.6
  Bottom Layer w20: Middle1.2 3652,2678 3677,2678 R10.1
NetR12_1: R12.1 RightMiddle1.2 | length 369.5
  Top Layer w20: RightMiddle1.2@3704.8,2784.8 cw(c3668.1,2748.1) 3720,2748.1 cw(c3771.9,2748.1) RightMiddle1.2@3735.2,2784.8 ; RightMiddle1.2 3720,2720 R12.1 ; R12.1@3802.44,2620 ccw(c3760.05,2620) 3790.02,2649.98 ccw(c3820,2679.95) R12.1@3820,2637.56
NetR14_1: R14.1 Right1.2 | length 180
  Top Layer w20: R14.1 Right1.2
NetSIP1_4: SIP1.4 Switch1.8 | length 288.1
  Top Layer w20: Switch1.8@2571.19,1103.81 ccw(c2537.86,1137.14) 2585,1137.14 ccw(c2632.14,1137.14) Switch1.8@2598.81,1103.81 ; SIP1.4@2571.19,1216.19 cw(c2537.86,1182.86) 2585,1182.86 cw(c2632.14,1182.86) SIP1.4@2598.81,1216.19 ; Switch1.8 SIP1.4
NMI: C6.1 P1.7 Programmer1.11 R1.1 | length 3504.9
  Top Layer w20: v1(2060,3375.61) 2060,3320 C6.1 ; C6.1@2121.38,3245 ccw(c2088.49,3245) 2111.75,3268.25 ccw(c2135,3291.51) 2135,3258.62 ccw(c2135,3291.51) 2158.25,3268.25 ccw(c2181.51,3245) 2148.62,3245 ccw(c2181.51,3245) 2158.25,3221.75 ccw(c2135,3198.49) C6.1@2135,3231.38 ; R1.1 2193,2508 2193,3187 C6.1 ; R1.1@2135,2467.56 ccw(c2135,2509.95) 2164.98,2479.98 ccw(c2194.95,2450) R1.1@2152.56,2450 ; P1.7 2374.53,2705.47 2374.53,3250.47 2300,3325 2215,3325 C6.1
  Bottom Layer w20: v1(2060,3375.61) 2073.39,3389 3131,3389 Programmer1.11 ; v1@2070.61,3365 cw(c2128.54,3307.06) 2128.54,3389
P1.0: LTC1.1 P2.8 | length 3480.1
  Top Layer w20: v1@3245.39,2404.39 cw(c3219.79,2378.79) 3256,2378.79 cw(c3292.21,2378.79) v1@3266.61,2404.39 ; v1(3256,2415) 3256,2028 3227,1999 3227,1918 3239,1906 3467,1906 3544,1983 3704,1983 3713,1974 3713,1600 3405,1292 3405,625 3430,600 3705,600 LTC1.1
  Bottom Layer w20: P2.8 3126,2545 v1(3256,2415) ; P2.8@2938.81,2531.19 cw(c2972.14,2497.86) 2972.14,2545 cw(c2972.14,2592.14) P2.8@2938.81,2558.81 ; v1@3241,2415 ccw(c3204.79,2415) 3230.39,2440.61 ccw(c3256,2466.21) v1@3256,2430
P1.1: LT1.1 P2.7 | length 2811
  Bottom Layer w20: LT1.1@1831.19,1788.81 ccw(c1797.86,1822.14) 1845,1822.14 ccw(c1892.14,1822.14) LT1.1@1858.81,1788.81 ; LT1.1 1845,1912 1922,1989 2058,1989 2210,1837 2210,1575 2400,1385 2501,1385 2513.35,1397.35 2513.35,1450 2812.35,1749 2839,1749 2865,1775 2865,1982 2796,2051 2796,2516 P2.7
P1.2: P2.6
P1.3: P2.5
P2.0: P1.8 Pot3.2 | length 6990.2
  Top Layer w20: P1.8 2542,2652 2542,3318 2700,3476 4000,3476 4126,3350 4126,2379 4078,2331 4078,399 3833,154 3400,154 3330,224 3330,458 3200,588 Pot3.2 ; P1.8@2435,2564.53 ccw(c2435,2611.67) 2468.34,2578.34 ccw(c2501.67,2545) P1.8@2454.53,2545
P2.1: P1.9 SIP1.1 Switch1.5 | length 1837.6
  Top Layer w20: P1.9@2435,2425.47 cw(c2435,2378.33) 2468.34,2411.66 cw(c2501.67,2445) P1.9@2454.53,2445 ; P1.9 2715,2165 2715,1597.91 2719.02,1593.89 2719.02,1395.98 SIP1.1 Switch1.5 ; SIP1.1@2865.47,1230 ccw(c2818.33,1230) 2851.66,1263.34 ccw(c2885,1296.67) SIP1.1@2885,1249.53 ; Switch1.5@2871.19,1103.81 ccw(c2837.86,1137.14) 2885,1137.14 ccw(c2932.14,1137.14) Switch1.5@2898.81,1103.81 ; SIP1.1@2871.19,1216.19 cw(c2837.86,1182.86) 2885,1182.86 cw(c2932.14,1182.86) SIP1.1@2898.81,1216.19
P2.2: P1.10 SIP1.2 Switch1.6 | length 1696.2
  Top Layer w20: P1.10@2435,2325.47 cw(c2435,2278.33) 2468.34,2311.66 cw(c2501.67,2345) P1.10@2454.53,2345 ; P1.10 2675,2105 2675,1340 SIP1.2 Switch1.6 ; SIP1.2@2765.47,1230 ccw(c2718.33,1230) 2751.66,1263.34 ccw(c2785,1296.67) SIP1.2@2785,1249.53 ; Switch1.6@2771.19,1103.81 ccw(c2737.86,1137.14) 2785,1137.14 ccw(c2832.14,1137.14) Switch1.6@2798.81,1103.81 ; SIP1.2@2771.19,1216.19 cw(c2737.86,1182.86) 2785,1182.86 cw(c2832.14,1182.86) SIP1.2@2798.81,1216.19
P2.3: P2.10
P2.4: P2.9
P2.5: P1.3
P2.6: P1.6
P2.7: P1.5
P3.0: P1.11 SIP1.3 Switch1.7 | length 1554.8
  Top Layer w20: P1.11@2435,2225.47 cw(c2435,2178.33) 2468.34,2211.66 cw(c2501.67,2245) P1.11@2454.53,2245 ; P1.11 2635,2045 2635,1280 SIP1.3 Switch1.7 ; SIP1.3@2665.47,1230 ccw(c2618.33,1230) 2651.66,1263.34 ccw(c2685,1296.67) SIP1.3@2685,1249.53 ; Switch1.7@2671.19,1103.81 ccw(c2637.86,1137.14) 2685,1137.14 ccw(c2732.14,1137.14) Switch1.7@2698.81,1103.81 ; SIP1.3@2671.19,1216.19 cw(c2637.86,1182.86) 2685,1182.86 cw(c2732.14,1182.86) SIP1.3@2698.81,1216.19
P3.1: LTC1.3 P1.12 | length 2609.8
  Top Layer w20: v1@2795,1922 cw(c2758.79,1922) 2784.39,1896.39 cw(c2810,1870.79) v1@2810,1907 ; v1(2810,1922) 2755,1867 2755,1780 2785,1750 2785,1432.43 3010,1207.43 v1(3010,636)
  Bottom Layer w20: P1.12 2658,1922 v1(2810,1922) ; v1(3010,636) 3217.03,636 3300.56,719.53 3505.47,719.53 LTC1.3 ; v1@3020.61,625.39 cw(c3046.21,599.79) 3046.21,636 cw(c3046.21,672.21) v1@3020.61,646.61
P3.2: P1.13
P3.3: LTC1.2 P1.14 | length 2419.1
  Top Layer w20: v1(2810,1805) 2825,1790 2825,1449 3295,979 3295,589.14 3342.14,542 v1(3547,542)
  Bottom Layer w20: P1.14@2435,1925.47 cw(c2435,1878.33) 2468.34,1911.66 cw(c2501.67,1945) P1.14@2454.53,1945 ; P1.14 2575,1805 v1(2810,1805) ; v1@2799.39,1794.39 ccw(c2773.79,1768.79) 2773.79,1805 ccw(c2773.79,1841.21) v1@2799.39,1815.61 ; v1(3547,542) LTC1.2
P3.4: Middle1.1 P2.14 | length 2124.8
  Top Layer w20: v1@3315.39,2420.61 ccw(c3289.79,2446.21) 3326,2446.21 ccw(c3362.21,2446.21) v1@3336.61,2420.61 ; v1(3326,2410) 3326,2696 Middle1.1
  Bottom Layer w20: P2.14@2925,1925.47 cw(c2925,1878.33) 2958.34,1911.66 cw(c2991.67,1945) P2.14@2944.53,1945 ; P2.14 2965,1905 3325,1905 3353.42,1933.42 3353.42,2034.58 3325,2063 3230.99,2063 3191.5,2023.5 3068.5,2023.5 3068.5,2328.5 3100,2360 3300,2360 ; v1@3311.62,2405.74 cw(c3267.37,2392.63) 3300,2360 ; 3323.77,2383.77 ccw(c3304.05,2403.5) v1@3330.79,2411.42 ; v1(3326,2410) 3326,2386 3300,2360
P3.5: P2.13 RightMiddle1.1 | length 1626.7
  Top Layer w20: v1(3292.5,1983.5) 3332,2023 3332,2341 3450,2341 3478,2369 3478,2658 RightMiddle1.1 ; RightMiddle1.1@3598.5,2800 cw(c3546.61,2800) 3583.3,2763.3 cw(c3620,2726.61) RightMiddle1.1@3620,2778.5
  Bottom Layer w20: P2.13@2925,2025.47 cw(c2925,1978.33) 2958.34,2011.66 cw(c2991.67,2045) P2.13@2944.53,2045 ; P2.13 2986.5,1983.5 v1(3292.5,1983.5) ; v1@3281.9,1972.9 ccw(c3256.29,1947.29) 3256.29,1983.5 ccw(c3256.29,2019.72) v1@3281.9,1994.11
P3.6: P2.12 Right1.1 | length 3205.5
  Top Layer w20: v1@2840.39,2229.61 ccw(c2814.79,2255.21) 2851,2255.21 ccw(c2887.21,2255.21) v1@2861.61,2229.61 ; v1(2851,2219) 2851,3300 2986,3435 3713.8,3435 3835,3313.8 3835,2825 ; Right1.1@3794.8,2815.2 ccw(c3697.75,2912.25) 3835,2912.25 ; Right1.1@3808.94,2801.06 ccw(c3746.03,2863.97) 3835,2863.97 ; Right1.1 3835,2825 ; Right1.1@3816.5,2820.49 ccw(c3822.04,2837.96) 3835,2825 ; Right1.1@3830.49,2806.5 cw(c3847.96,2812.04) 3835,2825
  Bottom Layer w20: v1@2851,2204 cw(c2851,2167.79) 2876.61,2193.39 cw(c2902.21,2219) v1@2866,2219 ; v1(2851,2219) P2.12 ; P2.12@2905.47,2145 ccw(c2858.33,2145) 2891.66,2178.34 ccw(c2925,2211.67) P2.12@2925,2164.53
P3.7: P2.11
P4.0: LCD1.11 P1.17 | length 742.4
  Bottom Layer w20: LCD1.11 2375,2140 2375,1705 P1.17 ; P1.17@2415.47,1645 ccw(c2368.33,1645) 2401.66,1678.34 ccw(c2435,1711.67) P1.17@2435,1664.53
P4.1: LCD1.12 P1.18 | length 742.4
  Top Layer w20: LCD1.12 2373,2042 2373,1607 P1.18 ; P1.18@2415.47,1545 ccw(c2368.33,1545) 2401.66,1578.34 ccw(c2435,1611.67) P1.18@2435,1564.53
P4.2: LCD1.13 P1.19 | length 816.5
  Bottom Layer w20: LCD1.13@2270,2025.47 cw(c2270,1978.33) 2303.34,2011.66 cw(c2336.67,2045) LCD1.13@2289.53,2045 ; LCD1.13 2332,1983 2332,1548 P1.19 ; P1.19@2415.47,1445 ccw(c2368.33,1445) 2401.66,1478.34 ccw(c2435,1511.67) P1.19@2435,1464.53
P4.3: LCD1.14 P2.19 | length 1525.8
  Top Layer w20: LCD1.14@2270,1925.47 cw(c2270,1878.33) 2303.34,1911.66 cw(c2336.67,1945) LCD1.14@2289.53,1945 ; LCD1.14 2330,1885 2330,1448 2393,1385 2539,1385 v1(2574,1420) ; v1@2559,1420 cw(c2522.79,1420) 2548.39,1394.39 cw(c2574,1368.79) v1@2574,1405
  Bottom Layer w20: v1(2574,1420) 2900,1420 P2.19 ; v1@2584.61,1409.39 cw(c2610.21,1383.79) 2610.21,1420 cw(c2610.21,1456.21) v1@2584.61,1430.61 ; 2817.5,1420 ccw(c2817.5,1552.5) P2.19@2911.19,1458.81 ; 2865.79,1420 ccw(c2865.79,1504.21) P2.19@2925.33,1444.67
P4.4: LCD1.4 P2.18 | length 2761
  Top Layer w20: v1@2632,3313 cw(c2632,3276.79) 2657.61,3302.39 cw(c2683.21,3328) v1@2647,3328 ; v1(2632,3328) 2763,3197 2763,2133 2865,2031 2865,1605 P2.18 ; P2.18@2905.47,1545 ccw(c2858.33,1545) 2891.66,1578.34 ccw(c2925,1611.67) P2.18@2925,1564.53
  Bottom Layer w20: LCD1.4 2375,3050 2375,3303 2400,3328 v1(2632,3328) ; v1@2621.39,3317.39 ccw(c2595.79,3291.79) 2595.79,3328 ccw(c2595.79,3364.21) v1@2621.39,3338.61
P4.5: LCD1.6 P2.17 | length 5292.1
  Top Layer w20: P2.17@2925,1625.47 cw(c2925,1578.33) 2958.34,1611.66 cw(c2991.67,1645) P2.17@2944.53,1645 ; P2.17 2992,1578 2992,1469 3350,1111 v1(3350,626) ; v1@3339.39,636.61 ccw(c3313.79,662.21) 3350,662.21 ccw(c3386.21,662.21) v1@3360.61,636.61
  Bottom Layer w20: LCD1.6 1725,2200 1725,800 1881,644 2727,644 2795,576 3300,576 v1(3350,626) ; v1@3335,626 cw(c3298.79,626) 3324.39,600.39 cw(c3350,574.79) v1@3350,611
P4.6: Left1.1 P2.16 | length 1180.8
  Top Layer w20: P2.16 3050,1870 Left1.1 ; P2.16@2925,1764.53 ccw(c2925,1811.67) 2958.34,1778.34 ccw(c2991.67,1745) P2.16@2944.53,1745
P4.7: LeftMiddle1.1 P2.15 | length 1475.8
  Top Layer w20: P2.15 2985,1905 2985,2858 2989,2862 3178,2862 LeftMiddle1.1 ; P2.15@2925,1864.53 ccw(c2925,1911.67) 2958.34,1878.34 ccw(c2991.67,1845) P2.15@2944.53,1845 ; LeftMiddle1.1@3218.5,2800 ccw(c3166.61,2800) 3203.3,2836.7 ccw(c3240,2873.39) LeftMiddle1.1@3240,2821.5
TCK: P2.4 Programmer1.7 | length 879.4
  Top Layer w20: P2.4 3115.47,3135.47 3115.47,3275 3145,3304.53 3415.47,3304.53 Programmer1.7 ; P2.4@2925,2964.53 ccw(c2925,3011.67) 2958.34,2978.34 ccw(c2991.67,2945) P2.4@2944.53,2945
TDI: P2.2 Programmer1.3 | length 1567.8
  Bottom Layer w20: P2.2 3073,2997 3732,2997 3835,3100 3835,3305 3700,3305 ; Programmer1.3@3664.74,3261.62 ccw(c3653.4,3280) 3675,3280 ; Programmer1.3@3674.58,3244.78 cw(c3705.53,3261.07) 3680.8,3285.8 ; Programmer1.3 3675,3280 ; Programmer1.3@3685.26,3261.62 cw(c3696.6,3280) 3675,3280 ; Programmer1.3@3692.28,3254.09 cw(c3730.69,3274.31) 3700,3305 ; 3675,3280 3700,3305
TDO: P2.1 Programmer1.1 | length 1119.1
  Top Layer w20: P2.1 3071,3391 3629,3391 Programmer1.1 ; P2.1@2925,3264.53 ccw(c2925,3311.67) 2958.34,3278.34 ccw(c2991.67,3245) P2.1@2944.53,3245 ; Programmer1.1@3755.47,3245 ccw(c3708.33,3245) 3741.66,3278.34 ccw(c3775,3311.67) Programmer1.1@3775,3264.53
TEST: P1.1 Programmer1.8 | length 1453.9
  Bottom Layer w20: P1.1 2680,3245 2779.53,3344.53 3024.53,3344.53 3086.62,3282.44 3086.62,3136.38 3146,3077 3407,3077 Programmer1.8 ; P1.1@2448.81,3231.19 cw(c2482.14,3197.86) 2482.14,3245 cw(c2482.14,3292.14) P1.1@2448.81,3258.81 ; Programmer1.8@3455.47,3145 cw(c3408.33,3145) 3441.66,3111.66 cw(c3475,3078.33) Programmer1.8@3475,3125.47
TMS: P2.3 Programmer1.5 | length 1024.6
  Top Layer w20: P2.3 3075.47,3195.47 3075.47,3300 3120,3344.53 3475.47,3344.53 Programmer1.5 ; P2.3@2925,3064.53 ccw(c2925,3111.67) 2958.34,3078.34 ccw(c2991.67,3045) P2.3@2944.53,3045 ; Programmer1.5@3555.47,3245 ccw(c3508.33,3245) 3541.66,3278.34 ccw(c3575,3311.67) Programmer1.5@3575,3264.53
VDAC: C17.1 LTC1.5 Pot1.1 | length 1745.3
  Bottom Layer w20: Pot1.1 2162,383 2982,383 C17.1 3205,360 LTC1.5 ; C17.1@3091.38,260 ccw(c3058.49,260) 3081.75,283.25 ccw(c3105,306.51) 3105,273.62 ccw(c3105,306.51) 3128.25,283.25 ccw(c3151.51,260) C17.1@3118.62,260 ; LTC1.5@3451.19,346.19 ccw(c3417.86,312.86) 3417.86,360 ccw(c3417.86,407.14) LTC1.5@3451.19,373.81
VDACPOT: LM1.3 Pot1.2 | length 874.9
  Top Layer w20: LM1.3 2090,1034 2200,924 2275.06,924 2349.53,849.53 2349.53,714.53 Pot1.2 ; Pot1.2@2140,518.62 ccw(c2140,551.51) 2163.25,528.25 ccw(c2186.51,505) Pot1.2@2153.62,505
VDC: C11.1 C13.1 C14.2 LM2.1 Power1.1 | length 2745.2
  Top Layer w20: LM2.1@3114.8,2069.8 cw(c3078.1,2033.1) 3130,2033.1 cw(c3181.9,2033.1) LM2.1@3145.2,2069.8 ; C14.2@3241.38,2495 cw(c3208.49,2495) 3231.75,2471.75 cw(c3255,2448.49) C14.2@3255,2481.38 ; C14.2 3200.36,2440.36 3200.36,2155.36 LM2.1 3130,1957 3320.43,1766.57 C11.1 ; C11.1@3398.28,1754.85 ccw(c3369.98,1726.56) 3369.98,1766.57 ccw(c3369.98,1806.59) C11.1@3398.28,1778.29
  Bottom Layer w20: C14.2 3341.57,2495 C13.1 3849.57,2426.57 4020,2597 Power1.1 ; C14.2@3264.63,2485.37 cw(c3287.89,2462.11) 3287.89,2495 cw(c3287.89,2527.89) C14.2@3264.63,2504.63 ; C13.1@3421.72,2414.85 cw(c3450.02,2386.56) 3450.02,2426.57 cw(c3450.02,2466.59) C13.1@3421.72,2438.29 ; Power1.1@4006.19,3131.19 cw(c3972.86,3097.86) 4020,3097.86 cw(c4067.14,3097.86) Power1.1@4033.81,3131.19
VIN: R6.1 Vin1.1 | length 768.7
  Bottom Layer w20: R6.1 3802,2022 4002,2022 4080,2100 4080,2135 Vin1.1 ; Vin1.1@4120.47,2195 cw(c4073.33,2195) 4106.66,2161.66 cw(c4140,2128.33) Vin1.1@4140,2175.47
VPOT: LCD1.3 Pot2.2 | length 4008.4
  Bottom Layer w20: LCD1.3 2193,2968 2193,2950 2152,2909 1839,2909 1565,2635 1565,699 1700,564 2561,564 Pot2.2 ; Pot2.2@2606.38,505 ccw(c2573.49,505) 2596.75,528.25 ccw(c2620,551.51) Pot2.2@2620,518.62
pads on no net: LCD1.7 LCD1.8 LCD1.9 LCD1.10 LCD1.15 LCD1.16 LM1.1 LM1.7 LM1.8 LTC1.8 Programmer1.4 Programmer1.6 Programmer1.10 Programmer1.12 Programmer1.13 Programmer1.14 SIP1.5 SIP1.6 SIP1.7 SIP1.8 SIP1.9

## Polygon pours and split planes (outlines as drawn)
GND on Bottom Layer "TopGND" (solid, remove dead copper, pour order 6): 1400,3665 4540,3665 4540,0 1400,0 1400,3665
GND on Top Layer "TopGND" (solid, remove dead copper, pour order 8): 1400,0 1400,3665 4540,3665 4540,0 1400,0

## Keep-outs
Keep-Out Layer:
  lines w10: 1400,0 4475,0 4540,0 4540,3665 1400,3665 1400,1825 1400,0

## Other copper
Top Layer:
  text "Guitar_Tuner V2.0" at 1735,275 h60 r90
  text "Clay Brooks" at 1855,275 h60 r90

## Text inside footprints (layer, text, board x,y; h text height)
LM2: Top Overlay "3" at 3280.59,2265.32 h59.06 r90; Top Overlay "1" at 3280.59,2075.16 h59.06 r90; Top Overlay "2" at 3280.59,2165.32 h59.06 r90
Programmer1: Top Overlay "13" at 3021.62,3224.41 h50; Top Overlay "14" at 3031.62,3114.41 h50; Top Overlay "1" at 3866.62,3229.41 h50; Top Overlay "2" at 3856.62,3129.41 h50